# Altium PCB Y904A23-GF-DYPCB-V1.0.PcbDoc
Units mm, origin at the board's own origin, x right, y up, seen from the top; angles counter-clockwise.
Board outline 153.03 x 81.79 mm, 4 copper layers (Top Layer, Mid-Layer 1, Mid-Layer 2, Bottom Layer); 116 components, 55 nets, 310 pads, 176 vias.
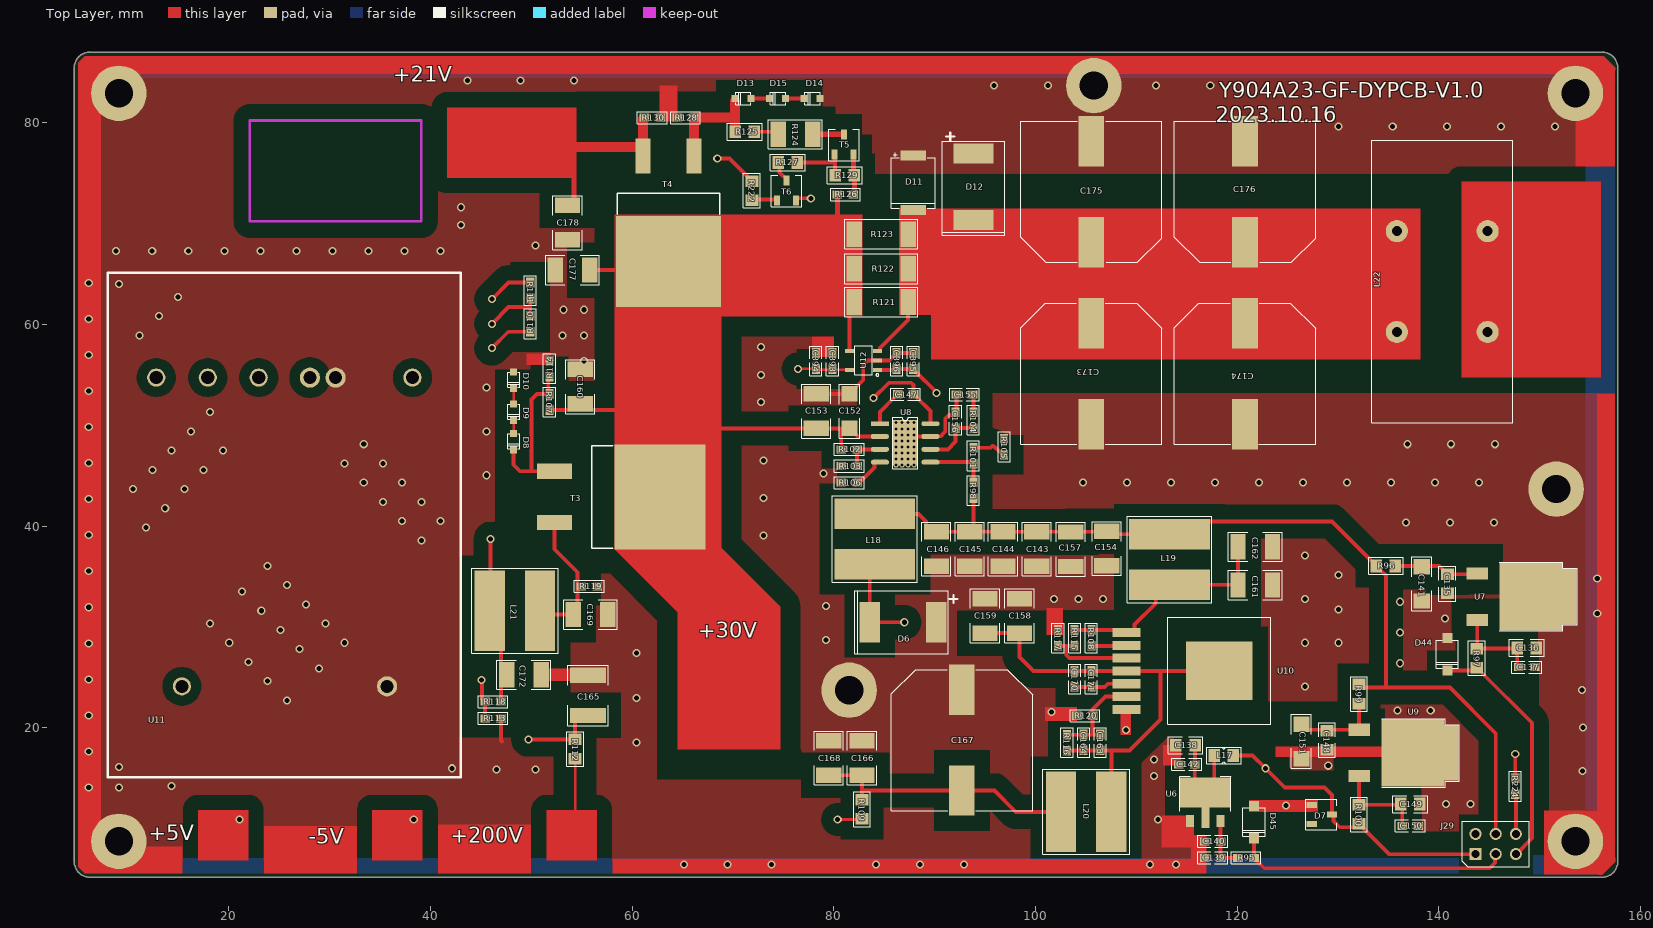
[diagram p0: Top Layer view]
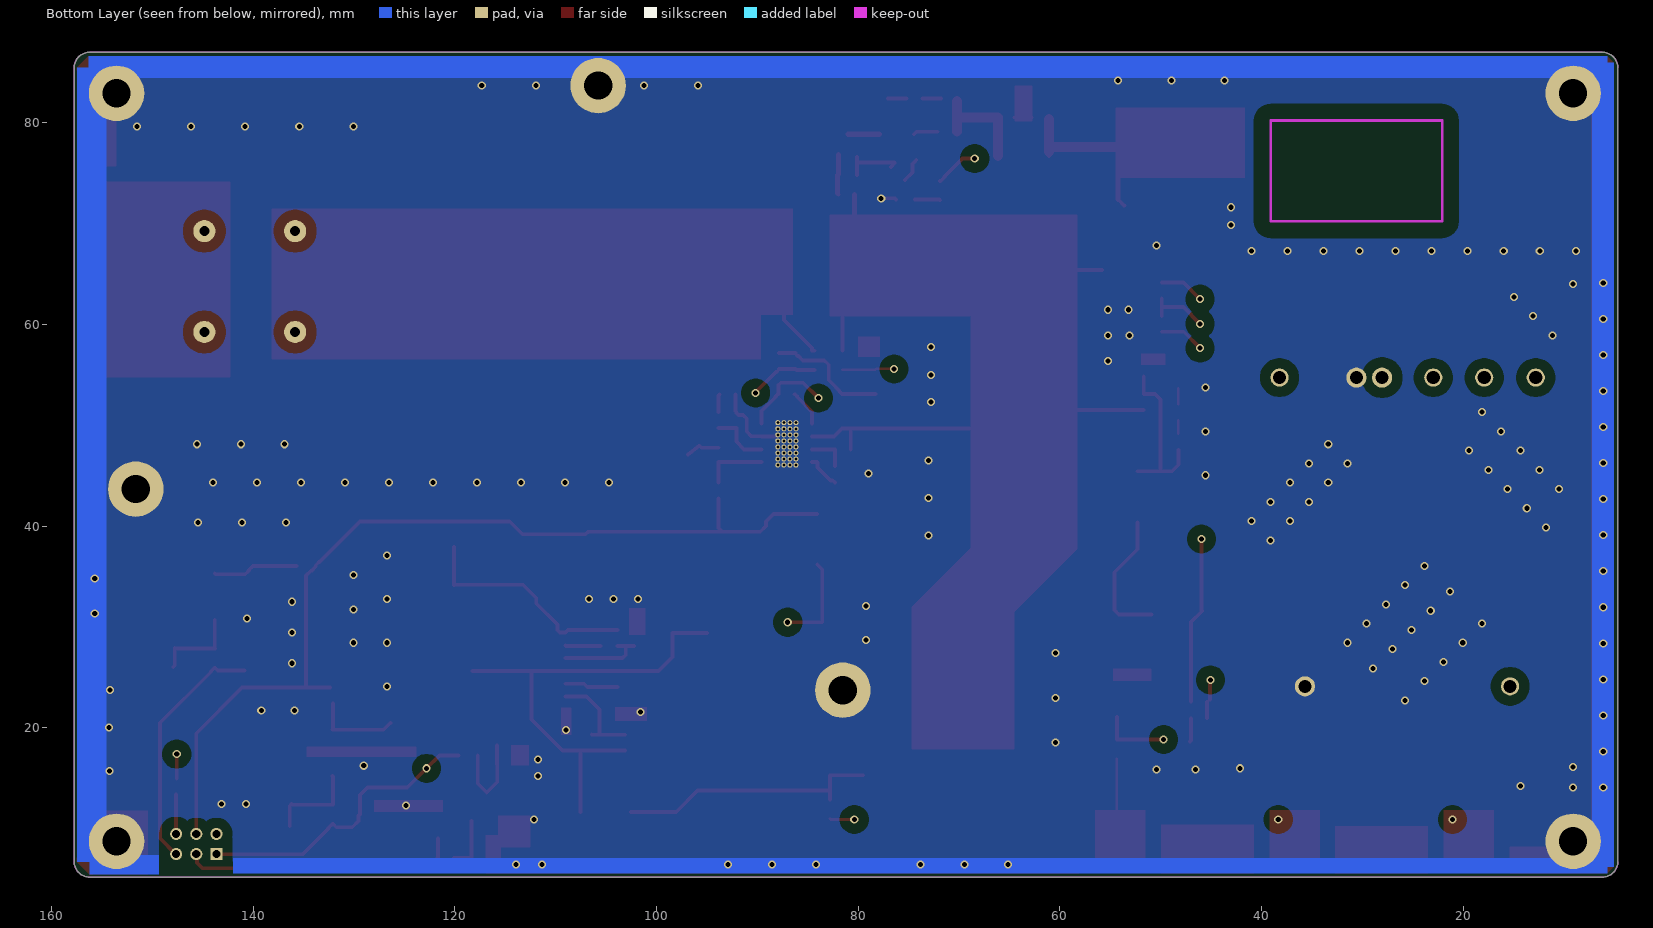
[diagram p1: Bottom Layer view, seen from below]
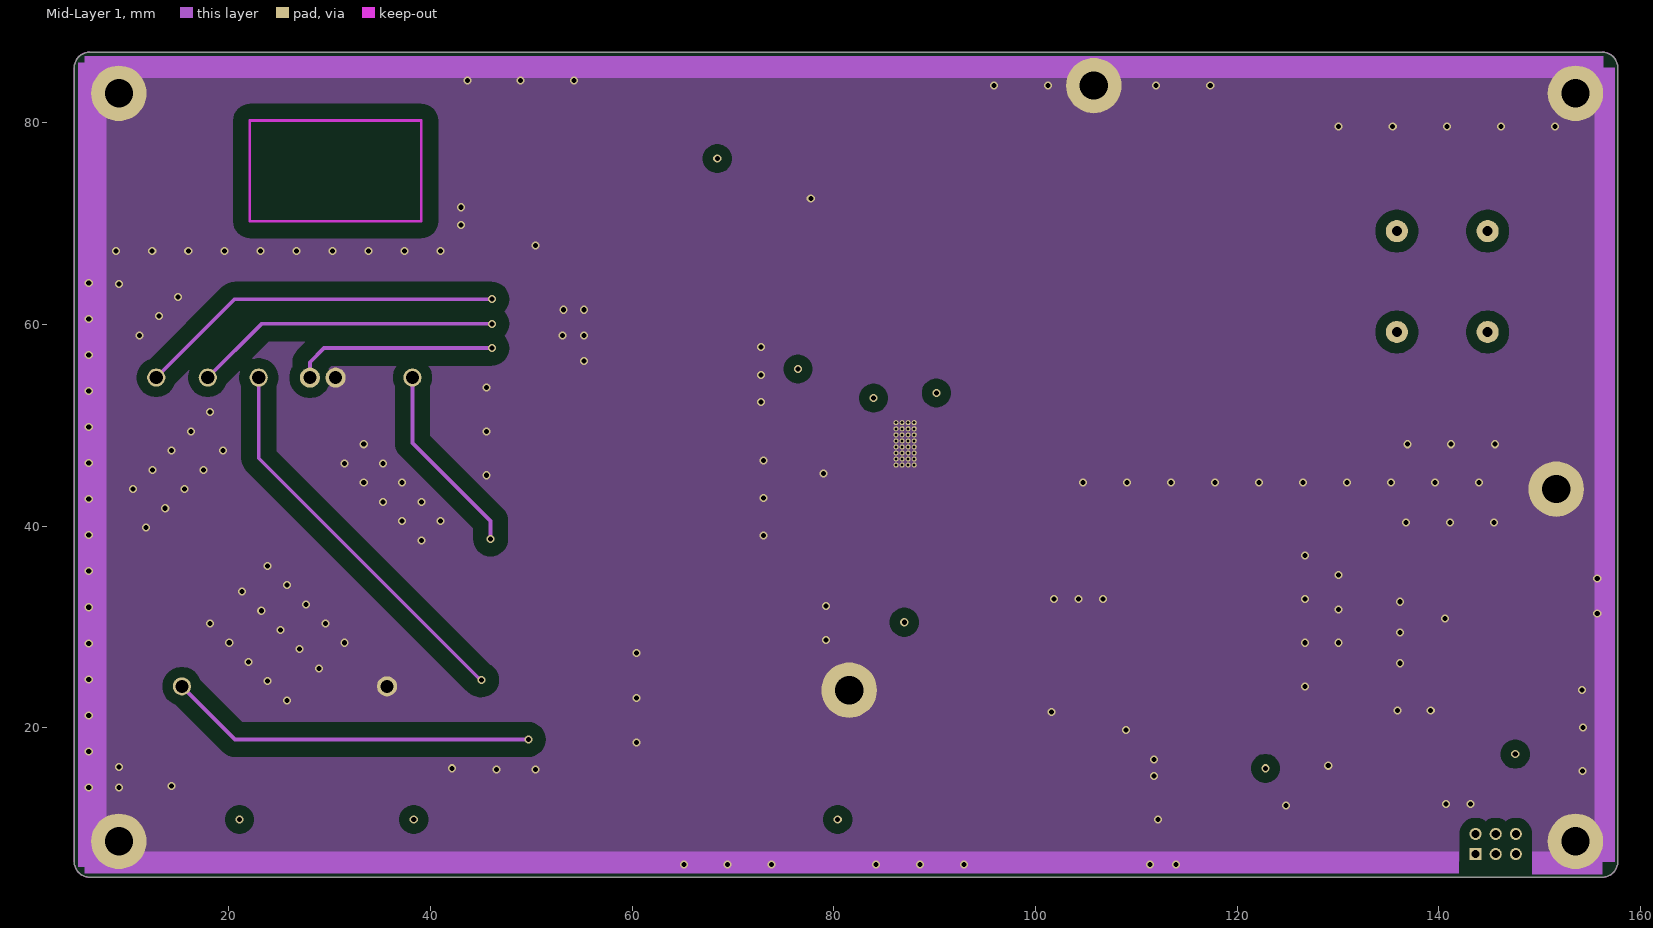
[diagram p2: Mid-Layer 1]
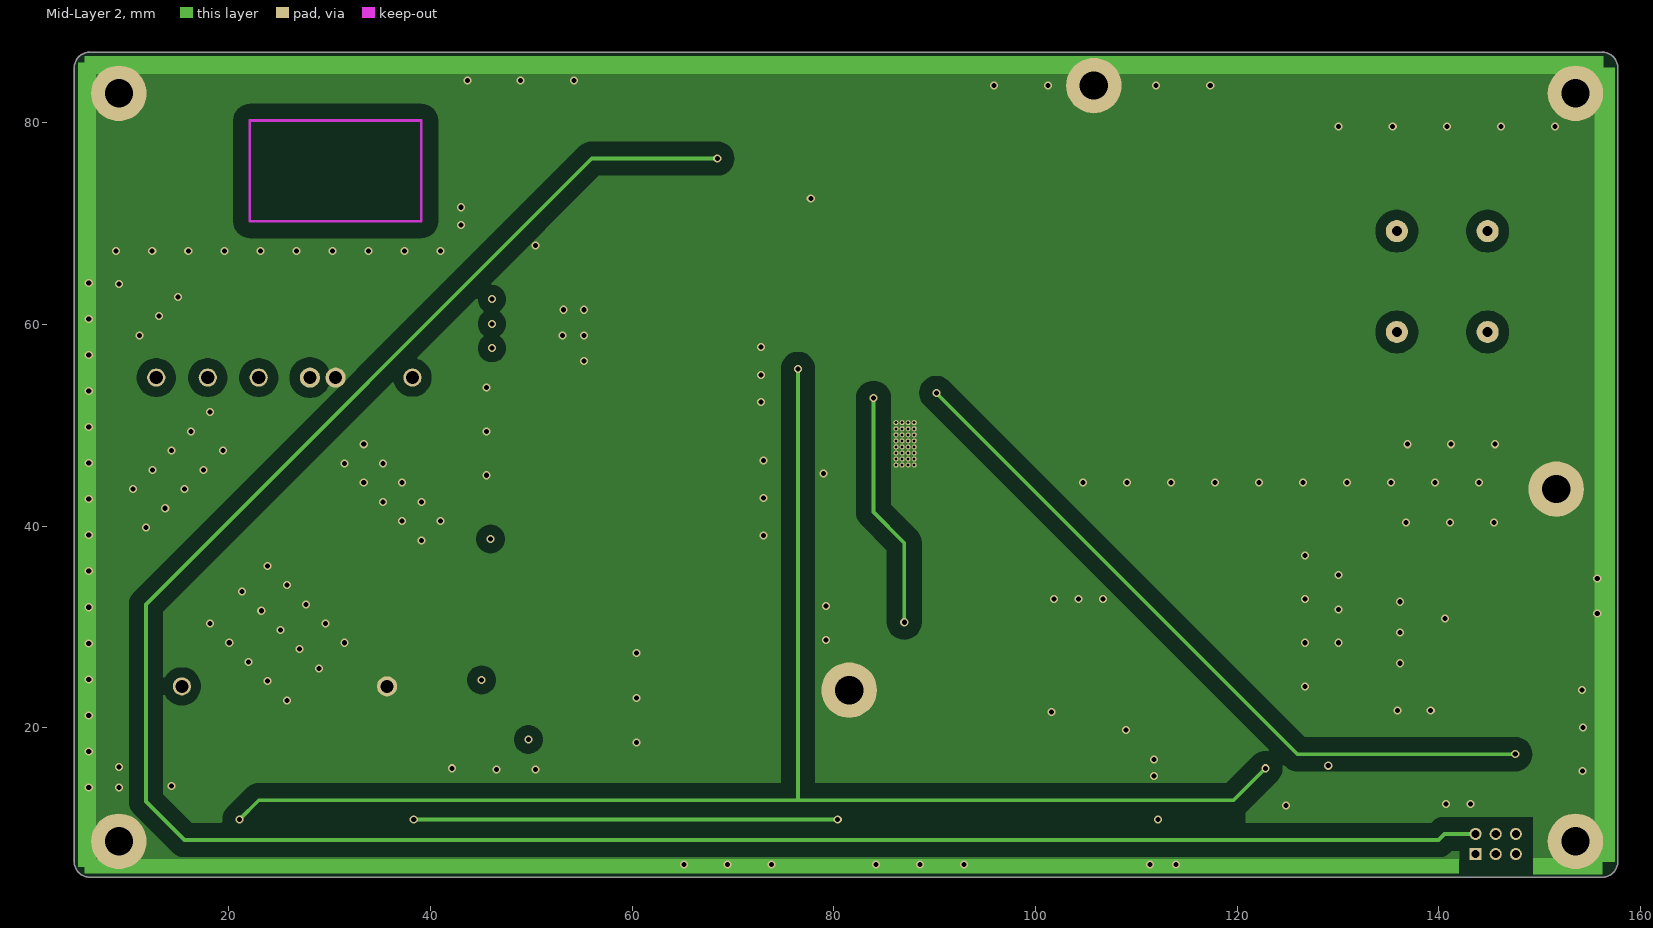
[diagram p3: Mid-Layer 2]

## Layer stack, top to bottom
Top Solder: solder mask 0.0102, Solder Resist, Dk 3.5
Top Layer: signal copper 0.0356
Dielectric 1: dielectric 0.32, FR-4, Dk 4.8
Mid-Layer 1: signal copper 0.0356
Dielectric2: dielectric 0.32, FR-4, Dk 4.8
Mid-Layer 2: signal copper 0.0356
Dielectric3: dielectric 0.32, FR-4, Dk 4.8
Bottom Layer: signal copper 0.0356
Bottom Solder: solder mask 0.0102, Solder Resist, Dk 3.5

## Board outline
4.699,6.731 4.699,85.471 cw(c6.223,85.471) 6.223,86.995 156.21,86.995 cw(c156.21,85.471) 157.734,85.471 157.734,6.731 cw(c156.21,6.731) 156.21,5.207 6.223,5.207 cw(c6.223,6.731)

## Design rules (kind name [scope] priority, off if disabled: settings)
Clearance LBBZHUANYONG [InNamedPolygon('LB')] p1: gap=0.254 ignorepadtopadclearanceinfootprint=TRUE except(0: Arc-Hole Track-Hole SMDPad-Hole THPad-Hole Via-Hole Fill-Hole Poly-Hole Region-Hole Text-Hole; 1.016: Arc-Poly THPad-Poly Via-Poly Poly-Poly; 1.524: Track-Poly SMDPad-Poly Fill-Poly; 2.032: Poly-Region)
Clearance KZBZHUANYONG [InNamedPolygon('KZ')] p2: gap=0.254 ignorepadtopadclearanceinfootprint=TRUE except(0: Arc-Hole Track-Hole SMDPad-Hole THPad-Hole Via-Hole Fill-Hole Poly-Hole Region-Hole Text-Hole; 1.016: Arc-Poly Track-Poly THPad-Poly Via-Poly Poly-Poly; 1.524: SMDPad-Poly Fill-Poly; 2.032: Poly-Region)
Clearance [All] p3: gap=0.2 ignorepadtopadclearanceinfootprint=TRUE except(0: Arc-Hole Track-Hole SMDPad-Hole THPad-Hole Via-Hole Fill-Hole Poly-Hole Region-Hole Text-Hole; 1.016: Arc-Poly THPad-Poly Via-Poly Poly-Poly; 1.524: Track-Poly SMDPad-Poly Fill-Poly; 2.032: Poly-Region)
ComponentClearance [All] p1 off: gap=0.254 collisioncheckmode=3 verticalgap=0.254 showdistances=FALSE
HoleSize [All] p1: absolutevalues=TRUE maxlimit=5 minlimit=0.025 maxpercent=80.000 minpercent=20.000
MinimumSolderMaskSliver [All] p1: minsoldermaskwidth=0.06
PolygonConnect [All] p1: connectstyle=Direct reliefconductorwidth=0.254 reliefentries=4 polygonreliefangle="90 Angle" airgapwidth=0.254
RoutingVias RoutingVias_NET [InNet('NET')] p1: holewidth=0.711 width=1.27 viastyle="Through Hole" minholewidth=0.711 minwidth=1.27 maxholewidth=0.711 maxwidth=1.27
RoutingVias [All] p2: holewidth=0.711 width=1.27 viastyle="Through Hole" minholewidth=0.3 minwidth=0.5 maxholewidth=5 maxwidth=5
SilkToSilkClearance [All] p1: silktosilkclearance=0
SilkToSolderMaskClearance [IsPad] p1: minsilkscreentomaskgap=0 clearancetoexposedcopper=TRUE
SolderMaskExpansion [All] p1: expansion=0.102 istentingtop=FALSE
Width [All] p1: maxlimit=15 minlimit=0.254 preferedwidth=0.838
25 further rules are at their usual default settings.

## Components (designator, comment, footprint, x,y, rotation, side; value= is the part's Value field where it differs from the comment)
C135 "0805-1uF-50V" C0805 140.843,34.29 r90 top
C136 "0805-10uF-16V" C0805 148.717,27.94 r180 top
C137 "0603-1uF-16V" C0603 148.717,26.035 r180 top
C138 "0805-4.7uF-16V" C0805 114.874,18.288 r0 top
C139 "0603-1uF-16V" C0603 117.574,7.112 r0 top
C140 "0603-1uF-16V" C0603 117.574,8.763 r0 top
C141 "1206-10uF-50V" C1206 138.303,34.29 r90 top
C142 "0603-1uF-16V" C0603 115.001,16.383 r0 top
C143 "1210-22uF-25V" C1210 100.132,37.74 r270 top
C144 "1210-22uF-25V" C1210 96.78,37.74 r270 top
C145 "1210-22uF-25V" C1210 93.478,37.74 r270 top
C146 "1210-22uF-25V" C1210 90.176,37.74 r270 top
C147 "0603-0.1uF-50V" C0603 87.122,53.086 r0 top
C148 "0805-1uF-50V" C0805 128.905,18.796 r90 top
C149 "0805-10uF-16V" C0805 137.16,12.446 r180 top
C150 "0603-1uF-16V" C0603 137.16,10.287 r180 top
C151 "1206-10uF-50V" C1206 126.365,18.669 r90 top
C152 "1206-1uF-100V" C1206 81.566,51.414 r90 top
C153 "1210-10uF-100V" C1210 78.264,51.414 r90 top
C154 "1210-10uF-50V" C1210 107.061,37.787 r90 top
C155 "0603-0.01uF-50V" C0603 92.964,53.058 r0 top
C156 "0603-39pF-50V" C0603 92.075,50.518 r270 top
C157 "1210-10uF-50V" C1210 103.505,37.719 r90 top
C158 "1210-10uF-50V" C1210 98.425,31.115 r270 top
C159 "1210-47uF-50V" C1210 94.996,31.115 r270 top
C160 "1210-1uF-100V" C1210 54.864,53.848 r90 top
C161 "1210-47uF-50V" C1210 121.793,34.163 r180 top
C162 "1210-10uF-50V" C1210 121.793,37.973 r180 top
C163 "0603-0.01uF-50V" C0603 106.426,18.57 r270 top
C164 "0603-0.01uF-50V" C0603 104.775,18.57 r270 top
C165 "1812-1000pF-2kV" C1812 55.626,23.241 r270 top
C166 "1210-47uF-50V" C1210 82.804,17.018 r270 top
C167 "VMML1351J221MV" CAE-13.5X13.5X13.5mm(SMD) 92.71,18.796 r90 top
C168 "1210-10uF-50V" C1210 79.502,17.018 r270 top
C169 "1210-47uF-50V" C1210 55.88,31.242 r0 top
C170 "0603-0.01uF-50V" C0603 103.886,24.864 r90 top
C171 "0603-0.01uF-50V" C0603 105.537,24.864 r90 top
C172 "1210-47uF-50V" C1210 49.276,25.273 r180 top
C173 "VMML1351J221MV" CAE-13.5X13.5X13.5mm(SMD) 105.537,55.118 r90 top
C174 "VMML1351J221MV" CAE-13.5X13.5X13.5mm(SMD) 120.777,55.118 r90 top
C175 "VMML1351J221MV" CAE-13.5X13.5X13.5mm(SMD) 105.537,73.152 r270 top
C176 "VMML1351J221MV" CAE-13.5X13.5X13.5mm(SMD) 120.777,73.152 r270 top
C177 "1210-1uF-100V" C1210 54.102,65.405 r180 top
C178 "1210-47uF-50V" C1210 53.594,70.104 r270 top
C393 "0603-0.1uF-50V" C0603 79.883,56.388 r270 top
C394 "0603-1000pF-50V" C0603 78.232,56.388 r270 top
C395 "0603-1000pF-50V" C0603 87.884,56.388 r270 top
C396 "0603-0.1uF-50V" C0603 86.233,56.388 r270 top
D6 "SM8100C" SMC 86.868,30.48 r270 top
D7 "LMBZ5236BLT1G" SOT-23 128.397,11.43 r270 top
D8 "MM5Z8V2T1G" SOD-523 48.26,48.387 r90 top
D9 "MM5Z10V1T1G" SOD-523 48.26,51.308 r90 top
D10 "MM5Z10V1T1G" SOD-523 48.26,54.483 r90 top
D11 "SMBFJ150A" SMB 87.884,74.041 r0 top
D12 "SM8100C" SMC 93.853,73.66 r0 top
D13 "MM5Z5V1T1G" SOD-523 70.993,82.407 r0 top
D14 "MM5Z10V1T1G" SOD-523 77.851,82.407 r0 top
D15 "MM5Z10V1T1G" SOD-523 74.422,82.407 r0 top
D44 "SMF6.5A" SOD-123FL 140.843,27.305 r180 top
D45 "SMF5.0A" SOD-123FL 121.666,10.668 r180 top
J29 "双排直插母座6孔" Ë«ÅÅÖ±²åÄ¸×ù6¿×£¨2*3PIN¼ä¾à2¸ß4.3£© 143.637,7.493 r90 top
L17 "CBG201209U310T" L0805 118.684,17.272 r0 top
L18 "PIO75-6R8MT" L7.8x7.0x5.0 84.074,38.735 r180 top
L19 "PIO75-470MT" L7.8x7.0x5.0 113.284,36.703 r0 top
L20 "PIO75-470MT" L7.8x7.0x5.0 105.029,11.684 r270 top
L21 "PIO75-470MT" L7.8x7.0x5.0 48.387,31.623 r270 top
L22 "T22*14*8-1MH 1.2线径 15A" T22*14*8 140.335,64.262 r0 top
R95 "0603-0R" R0603 120.876,7.112 r180 top
R96 "0805-0R" R0805 134.747,36.068 r180 top
R97 "0805-0R" R0805 143.764,26.924 r90 top
R98 "0603-143k" R0603 93.853,43.561 r270 top
R99 "0805-0R" R0805 132.08,23.368 r90 top
R100 "0805-0R" R0805 132.08,11.43 r90 top
R101 "0603-10k" R0603 93.853,46.99 r270 top
R102 "NC" R0603 81.534,47.625 r180 top
R103 "NC" R0603 81.534,45.974 r0 top
R104 "0603-12k" R0603 93.853,50.518 r270 top
R105 "0603-0R" R0603 96.901,47.879 r270 top
R106 "0603-100k" R0603 81.534,44.323 r0 top
R107 "0603-6.8k" R0603 51.816,52.324 r90 top value=137R
R108 "0603-30k" R0603 105.537,28.928 r90 top value=137R
R109 "0805-0R" R0805 82.804,11.938 r90 top value=137R
R110 "0603-4k" R0603 49.911,60.071 r90 top value=137R
R111 "0603-6k" R0603 49.911,63.373 r90 top value=137R
R112 "0805-0R" R0805 54.356,17.907 r90 top value=137R
R113 "NC" R0603 46.228,20.955 r180 top value=137R
R114 "0603-150k" R0603 51.816,55.626 r90 top value=137R
R115 "0603-68k" R0603 103.886,28.928 r270 top value=137R
R116 "0603-1.2k" R0603 103.124,18.542 r90 top value=137R
R117 "0603-12k" R0603 102.235,28.928 r270 top value=137R
R118 "NC" R0603 46.228,22.606 r180 top value=137R
R119 "0603-30k" R0603 55.753,34.036 r0 top value=137R
R120 "0603-6.2k" R0603 104.902,21.209 r0 top value=137R
R121 "PE2010FKF7W0R01L" R2010 84.709,62.23 r0 top
R122 "PE2010FKF7W0R01L" R2010 84.709,65.532 r0 top
R123 "PE2010FKF7W0R01L" R2010 84.709,68.961 r0 top
R124 "1210-10k" R1210 76.2,78.867 r180 top value=137R
R125 "0805-0R" R0805 71.181,79.121 r0 top value=137R
R126 "0603-10K" R0603 81.153,72.898 r0 top value=137R
R127 "0805-270k" R0805 75.438,76.073 r0 top value=137R
R128 "0603-120k" R0603 65.306,80.518 r180 top value=137R
R129 "0805-100k" R0805 81.092,74.803 r0 top value=137R
R130 "0603-30K" R0603 62.004,80.518 r0 top value=137R
R222 "0805-1k" R0805 71.882,73.279 r90 top value=137R
R224 "0603-1.5R" R0603 147.574,14.224 r270 top
T3 "NCE70T360D" TO-263-2 60.452,42.926 r270 top
T4 "NCE70T360D" TO-263-2 63.627,68.58 r180 top
T5 "BSR92P" SOT-23 81.026,77.851 r0 top
T6 "BSS131" SOT-23 75.311,73.279 r0 top
U6 "LP3986H-33X3F" SOT-89 116.84,13.589 r0 top
U7 "78D05" TO-252 149.098,33.02 r270 top
U8 "SCT2650" ESOP8L 84.582,50.165 r0 top
U9 "78D05" TO-252 137.414,17.526 r270 top
U10 "LMZ14201TZ" TO-263-7 118.237,25.654 r270 top
U11 "DW-P501-20FP1" DW-PXXX-20XP1 12.827,54.737 r90 top
U12 "INA194AIDBVR" SOT-23-5 84.328,55.499 r180 top

## Footprints (in the part's own frame and the unit in brackets; to place one, negate y for a bottom-side part, rotate by r counter-clockwise, add the part's x,y. Pads: shape width x height; smd on the part's side, far side on the other; paste and mask are expansions set on the pad)
C0603 [mm]
  rect 0.96x0.8 smd: 1(-0.79,0) 2(0.79,0)
  silkscreen extent -1.47,-0.6 1.47,0.6
C0805 [mm]
  rect 1.14x1.27 smd: 1(-0.95,0) 2(0.95,0)
  silkscreen extent -1.72,-0.83 1.72,0.83
C1206 [mm]
  rect 1.52x1.6 smd: 1(-1.71,0) 2(1.71,0)
  silkscreen extent -2.67,-1 2.67,1
C1210 [mm]
  rect 1.52x2.5 smd: 1(-1.71,0) 2(1.71,0)
  silkscreen extent -2.67,-1.45 2.67,1.45
C1812 [mm]
  rect 1.52x3.6 smd: 1(-2,0) 2(2,0)
  silkscreen extent -3,-2 3,2
CAE-13.5X13.5X13.5mm(SMD) [mm] "13.5X13.5X13.5mm"
  rect 5x2.54 smd: 1(5,0) 2(-5,0)
  silkscreen extent -7,-7 7,7
DW-PXXX-20XP1 [mm]
  round 1.8 hole 1.3: 1(0,0) 2(0,-5.11) 3(0,-10.16) 6(0,-25.4) 7(-30.61,-2.54)
  round 2 hole 1.3: 4(0,-15.24) 5(0,-17.78) 8(-30.61,-22.88)
  silkscreen extent -39.61,-30.19 10.39,4.81
ESOP8L [mm] "1.27mm"
  round 0.5 hole 0.3: 0(1.6,-4.1) 0(1.6,-3.5) 0(1.6,-2.9) 0(1.6,-2.3) 0(1.6,-1.7) 0(1.6,-1.1) 0(1.6,-0.5) 0(1.6,0.1) 0(2.2,-4.1) 0(2.2,-3.5) 0(2.2,-2.9) 0(2.2,-2.3) 0(2.2,-1.7) 0(2.2,-1.1) 0(2.2,-0.5) 0(2.2,0.1) 0(2.8,-4.1) 0(2.8,-3.5) 0(2.8,-2.9) 0(2.8,-2.3) 0(2.8,-1.7) 0(2.8,-1.1) 0(2.8,-0.5) 0(2.8,0.1) 0(3.4,-4.1) 0(3.4,-3.5) 0(3.4,-2.9) 0(3.4,-2.3) 0(3.4,-1.7) 0(3.4,-1.1) 0(3.4,-0.5) 0(3.4,0.1)
  rect 2.4x4.5 smd: 0(2.502,-1.905)
  rect 1.8x0.49 smd: 1(0,0)
  oval 1.8x0.49 smd: 2(0,-1.27) 3(0,-2.54) 4(0,-3.81) 5(5.005,-3.81) 6(5.005,-2.54) 7(5.005,-1.27) 8(5.005,0)
  silkscreen extent 1.26,-4.44 3.75,0.64
L7.8x7.0x5.0 [mm]
  rect 8x3 smd: 1(0,2.5) 2(0,-2.5)
  silkscreen extent -4.2,-4.3 4.2,4.3
L0805 [mm] "2.0X1.25(2012)"
  rect 1.14x1.27 smd: 1(-0.95,0) 2(0.95,0)
  silkscreen extent -1.72,-0.83 1.72,0.83
R0603 [mm] "1.6X0.8(1608)"
  rect 0.96x0.8 smd: 1(-0.79,0) 2(0.79,0)
  silkscreen extent -1.47,-0.6 1.47,0.6
R0805 [mm] "2.0X1.25(2012)"
  rect 1.14x1.27 smd: 1(-0.95,0) 2(0.95,0)
  silkscreen extent -1.72,-0.83 1.72,0.83
R1210 [mm] "3.2X2.5(3225)"
  rect 1.52x2.5 smd: 1(-1.71,0) 2(1.71,0)
  silkscreen extent -2.67,-1.45 2.67,1.45
R2010 [mm] "5.0X2.5(5025)"
  rect 1.52x2.54 smd: 1(-2.665,0) 2(2.665,0)
  silkscreen extent -3.62,-1.47 3.62,1.47
SMB [mm]
  rect 2.5x1 smd: 1(0,-2.7) 2(0,2.7)
  silkscreen extent -2.2,-2.5 2.2,3
SMC [mm]
  rect 4x2 smd: 1(0,-3.3) 2(0,3.3)
  silkscreen extent -3.1,-4.8 3.1,5.4
SOD-123FL [mm]
  rect 1x1 smd: 1(0,1.6) 2(0,-1.6)
  silkscreen extent -1.1,-1.4 1.1,1.4
SOD-523 [mm]
  rect 0.7x0.7 smd: 1(-0.8,0) 2(0.8,0)
  silkscreen extent -0.7,-0.6 0.8,0.6
SOT-23 [mm]
  rect 0.6x1 smd: 1(-0.95,-1) 2(0.95,-1) 3(0,1)
  silkscreen extent -1.5,-1.6 1.5,1.5
SOT-23-5 [mm]
  rect 0.9x0.4 smd: 1(0,0) 2(0,-0.95) 3(0,-1.9) 4(2.75,-1.9) 5(2.75,0)
  silkscreen extent -0.14,-2.4 2.24,0.64
SOT-89 [mm]
  rect 0.8x1.2 smd: 1(-1.5,-2.8) 3(1.5,-2.8)
  rect 0.8x2.2 smd mask+0.102: 2(0,-2.4)
  rect 5x3 smd mask+0.102: 2(0,0)
  Top Layer pour cut-out: -2.5,-1.475 2.5,-1.475 2.5,-3.375 -2.5,-3.375
  silkscreen extent -2.54,-1.85 2.54,1.6
T22*14*8 [mm]
  round 2.2 hole 1: 1(-4.5,5) 2(4.5,5) 3(-4.5,-5) 4(4.5,-5)
  silkscreen extent -7,-14 7,14
TO-252 [mm]
  rect 1.2x2.1 smd: 1(-2.3,-5.3) 3(2.3,-5.3)
  rect 5.5x1.5 smd: 2(0,3.8)
  rect 6.7x6.2 smd: 2(0,0)
  silkscreen extent -3.4,-3.1 3.4,4.6
TO-263-2 [mm]
  rect 1.5x3.5 smd: 1(-2.53,-8.135) 3(2.55,-8.135)
  rect 10.4x9 smd: 2(0.01,2.32)
  silkscreen extent -5.07,-4.45 5.09,-2.36
TO-263-7 [mm]
  rect 5.8x6.6 smd paste+0 mask+0.05: 0(0,0)
  rect 0.9x2.8 smd paste+0 mask+0.05: 1(-3.81,-9.2) 2(-2.54,-9.2) 3(-1.27,-9.2) 4(0,-9.2) 5(1.27,-9.2) 6(2.54,-9.2) 7(3.81,-9.2)
  silkscreen extent -5.3,-5.1 5.3,5.1
Ë«ÅÅÖ±²åÄ¸×ù6¿×£¨2*3PIN¼ä¾à2¸ß4.3£© [mm]
  rect 1.2x1.2 hole 0.8: 1(0,0)
  round 1.2 hole 0.8: 2(0,-2) 3(0,-4) 4(2,0) 5(2,-2) 6(2,-4)
  silkscreen extent -1.25,-5.3 3.25,1.3

## Part data
C135 C136 C137 C138 C139 C140 C141 C142 C143 C144 C145 C146 C147 C148 C149 C150 C151 C152 C153 C154 C155 C156 C157 C158 C159 C160 C161 C162 C163 C164 C165 C166 C168 C169 C170 C171 C172 C177 C178 C393 C394 C395 C396: library part Cap1, "ÌÕ´ÉµçÈÝ,³§¼Ò", ÐÔÄÜ=ÌÕ´ÉµçÈÝ
C167 C173 C174 C175 C176: "µç½âµçÈÝ,YminÓÀÃú", ³§¼Ò=YminÓÀÃú, ·â×°ÃèÊö=13.5X13.5X13.5mm, ÐÔÄÜ=63V220UF
D6 D12: "Ð¤ÌØ»ù¶þ¼«¹Ü,ÀÖÉ½ÎÞÏßµç", ³§¼Ò=ÀÖÉ½ÎÞÏßµç, ·â×°ÃèÊö=SMC, ÐÔÄÜ=100V£¬8A
D7: "ÎÈÑ¹¶þ¼«¹Ü,ÀÖÉ½ÎÞÏßµç", ³§¼Ò=ÀÖÉ½ÎÞÏßµç, ·â×°ÃèÊö=SOT-23, ÐÔÄÜ=7.12~7.88V
D8 D9 D10 D13 D14 D15: "ÎÈÑ¹¶þ¼«¹Ü,ON°²É­ÃÀ", ³§¼Ò=ON°²É­ÃÀ, ·â×°ÃèÊö=SOD-523
  D8: ÐÔÄÜ=8.2V
  D13: ÐÔÄÜ=5.1V
D11: "TVS¶þ¼«¹Ü,ÀÖÉ½ÎÞÏßµç", ³§¼Ò=ÀÖÉ½ÎÞÏßµç, ·â×°ÃèÊö=SMB, ÐÔÄÜ=150V£¬2.5A
D44 D45: "TVS¶þ¼«¹Ü,½­ËÕ³¤µç/³¤¾§", ³§¼Ò=½­ËÕ³¤µç/³¤¾§, ·â×°ÃèÊö=SOD-123FL
  D44: ÐÔÄÜ=6.5V£¬17.8A
  D45: ÐÔÄÜ=5V£¬21.7A
J29: library part Ë«ÅÅÖ±²åÄ¸×ù6¿×, "µçÁ¬½ÓÆ÷,³§¼Ò", ·â×°ÃèÊö=2*3PIN¼ä¾à2mm¸ß4.3mm, ÐÔÄÜ=Ë«ÅÅÖ±²åÄ¸×ù6¿×
L17: "´ÅÖé,·ç»ª", ³§¼Ò=·ç»ª, ·â×°ÃèÊö=L0805, ÐÔÄÜ=31¦¸@100MHz,900mA
L18 L19 L20 L21: "¹¦ÂÊµç¸Ð,·ç»ª", ³§¼Ò=·ç»ª, ·â×°ÃèÊö=L7.8x7.0x5.0mm
  L18: ÐÔÄÜ=6.8uH£¬3.0A£¬41m¦¸
  L19 L20 L21: ÐÔÄÜ=47uH£¬1.25A£¬190m¦¸
L22: library part "T22*14*8-1MH 1.2Ïß¾¶ 15A", "¹²Ä£µç¸Ð,ÉîÛÚ¿­±Ø´ï", ³§¼Ò=ÉîÛÚ¿­±Ø´ï, ·â×°ÃèÊö=T14*8*7, ÐÔÄÜ=³ÉÆ·Íâ¾¶16.5mm,³ÉÆ·ºñ¶È10.5mm,1mH0.8Ïß¾¶8A
R95 R96 R97 R98 R99 R100 R101 R102 R103 R104 R105 R106 R107 R108 R109 R110 R111 R112 R113 R114 R115 R116 R117 R118 R119 R120 R124 R125 R126 R127 R128 R129 R130 R222 R224: library part Resistance, "½ðÊôÓÔµç×è,³§¼Ò"
R121 R122 R123: "µçÁ÷²ÉÑùµç×è,YAGEO(¹ú¾Þ)", ³§¼Ò=YAGEO(¹ú¾Þ), ·â×°ÃèÊö=2010, ÐÔÄÜ="10m¦¸ ¡À1% 1W"
T3 T4: "NMOS,ÎÞÎýÐÂ½àÄÜ", ³§¼Ò=ÎÞÎýÐÂ½àÄÜ, ·â×°ÃèÊö=TO-263, ÐÔÄÜ="VDS =700V,ID=7A,Vth=3~4V"
T5: "PMOS,InfineonÓ¢·ÉÁè", ³§¼Ò=InfineonÓ¢·ÉÁè, ·â×°=SOT-23, ÐÔÄÜ="VDS =-250V,ID=-0.11A,Vth=-2~-1V"
T6: "NMOS,InfineonÓ¢·ÉÁè", ³§¼Ò=InfineonÓ¢·ÉÁè, ·â×°=SOT-23, ÐÔÄÜ="VDS =240V,ID=0.09A,Vth=0.8~1.8V"
U6: "LDO,Î¢Ô´°ëµ¼Ìå", ³§¼Ò=Î¢Ô´°ëµ¼Ìå, ·â×°ÃèÊö=SOT-89, ÐÔÄÜ="2.5 ~ 6.5V,3.3V,500mA"
U7 U9: "LDO,·ðÉ½À¶¼ý", ³§¼Ò=·ðÉ½À¶¼ý, ·â×°ÃèÊö=TO-252, ÐÔÄÜ=7~36V,5V,1.5A
U8: "DC-DC,Ð¾ÖÞ¿Æ¼¼", ³§¼Ò=Ð¾ÖÞ¿Æ¼¼, ·â×°ÃèÊö=ESOP8L, ÐÔÄÜ=4.5~60V,0.8~57V,5A
U10: "DC-DC,TIµÂÖÝÒÇÆ÷", ³§¼Ò=TIµÂÖÝÒÇÆ÷, ·â×°ÃèÊö=TO-263-7, ÐÔÄÜ=6~42V,0.8~6V,1A
U11: "DC-DC,¶«ÎÄ", ³§¼Ò=¶«ÎÄ, ·â×°ÃèÊö=50*35*20mm, ÐÔÄÜ=24V/500V/20mA
U12: "·ÖÁ÷¼à²â¼Æ,TI", ³§¼Ò=Ê¥°îÎ¢, ·â×°=SOT23-5, ÐÔÄÜ="-5V 60mA"

## Free pads (board coordinates)
  round 5.5 hole 2.8 mask+0: 2.8(9.121,8.763) 2.8(9.121,82.931) 2.8(81.534,23.749) 2.8(105.791,83.693) 2.8(151.638,43.688) 2.8(153.543,8.763) 2.8(153.543,82.931)

## Via types
v1: diameter 0.8, hole 0.5, Top Layer to Bottom Layer, tented bottom, 173 vias
v2: diameter 0.813, hole 0.508, Top Layer to Bottom Layer, tented bottom, 3 vias

## Nets (pads, with @x,y where several pads share a name; then routed paths per layer and width w, separated by ;. In a path a pad name is that pad's centre, name@x,y a point inside that pad or via, vN(x,y) a via of type N, cw(c..) or ccw(c..) an arc to the next point about the centre after c; other vN are vias at no path point)
3.3VFSALC: D45.1 J29.2 R95.1 | length 27.4
  Top Layer w0.381: D45.1 R95.1 121.746,7.112 121.956,6.902 121.956,6.822 122.682,6.096 145.034,6.096 145.576,6.638 145.576,7.41 J29.2@145.637,7.471
12V: C143.1 C144.1 C145.1 C146.1 C154.2 C157.2 J29.5 L18.2 L19.1 R96.2 R98.2 R99.2 | length 94.3
  Top Layer w0.381: L18.2 84.105,41.204 88.422,41.204 89.148,40.478 89.148,40.019 89.717,39.45 C146.1 C145.1 ; R98.2 93.853,39.825 C145.1 ; C157.2@103.484,39.45 C143.1 C144.1 C145.1 ; C157.2@103.505,39.45 106.786,39.45 106.807,39.429 107.033,39.203 L19.1 114.553,40.472 129.393,40.472 133.352,36.512 133.417,36.512 133.797,36.133 133.797,36.003 134.177,35.623 134.241,35.623 134.747,35.118 134.747,24.003 ; R99.2@132.395,24.003 134.747,24.003 ; J29.5 145.637,19.463 141.097,24.003 134.747,24.003
194out: C395.2 C396.2 R224.1 U12.1 | length 81.6
  Top Layer w0.381: U12.1 86.134,55.499 C396.2 C395.2 87.884,55.518 88.094,55.308 88.174,55.308 90.17,53.312 v1(90.17,53.213) ; R224.1@147.574,14.986 v1(147.574,17.399)
  Mid-Layer 2 w0.381: v1(90.17,53.213) 125.984,17.399 v1(147.574,17.399)
+5V: C393.2 C394.2 D7.3 J29.1 L17.2 R100.1 U12.5 | length 181.6
  Top Layer w0.254: v1(76.454,55.598) C394.2 78.331,55.499 U12.5
  Top Layer w0.381: L17.2 121.539,17.272 v1(122.809,16.002) 124.714,14.097 128.651,14.097 129.397,13.351 D7.3 129.444,11.43 129.553,11.321 129.553,10.782 130.175,10.16 131.76,10.16 R100.1 132.145,10.48 132.524,10.1 132.524,10.035 135.089,7.471 J29.1@143.637,7.471
  Mid-Layer 2 w0.381: v2(21.082,10.922) 22.987,12.827 76.454,12.827 ; v1(76.454,55.598) 76.454,12.827 ; v1(122.809,16.002) 119.634,12.827 76.454,12.827
+5VIN: D44.1 J29.3 R97.1 | length 24.5
  Top Layer w0.381: D44.1 143.495,25.705 R97.1 143.829,25.974 144.208,25.594 144.208,25.529 149.225,20.513 149.225,9.059 J29.3@147.637,7.471
+21V: C178.1 R130.1 T4.3 | length 23.3
  Top Layer w0.381: C178.1 53.659,71.814 C178.1@54.229,72.383 ; T4.3 T4.3@61.077,77.099 ; R130.1@61.077,80.381 R130.1
  Top Layer w0.504: 47.879,77.597 54.229,77.597 C178.1@54.229,72.383 ; T4.3@60.579,77.597 T4.3@61.077,77.099
  Top Layer w1: 54.229,77.597 T4.3@60.579,77.597 ; T4.3@61.077,77.099 R130.1@61.077,80.381
+30V: C152.1 C153.1 C160.1 C177.1 R102.2 R107.1 R121.1 R122.1 R123.1 R126.1 T3.2 T4.2 U8.2 U12.4 | length 43.7
  Top Layer w0.381: R107.1@51.689,51.534 53.848,51.534 58.646,51.534 58.674,51.562 ; C177.1 T4.2@60.535,65.405 ; T4.2@60.662,69.215 T4.2 ; 67.691,49.784 67.771,49.704 C153.1 80.645,49.704 ; R102.2 80.744,49.605 80.645,49.704 ; U12.4 81.578,61.764 R121.1 R121.1@82.614,61.66 ; U8.2 82.398,48.895 82.175,49.118 82.175,49.135 81.606,49.704 C152.1 80.645,49.704
  Top Layer w0.508: 80.363,70.358 R126.1
+30VIN: L22.2 L22.4
+200V: R112.1 | length 6.5
  Top Layer w0.254: 54.229,10.541 54.356,10.668 R112.1
-5V: R109.1 | length 44.5
  Top Layer w0.254: v2(80.391,10.922) 82.738,10.922 R109.1
  Mid-Layer 2 w0.381: v2(38.354,10.922) v2(80.391,10.922)
FLJC: J29.6 R224.2 | length 4
  Top Layer w0.381: R224.2@147.637,13.399 J29.6 J29.6@147.701,9.557
  Bottom Layer w0.381: J29.6@147.637,9.471 J29.6
FS: J29.4 R222.2 | length 232.5
  Top Layer w0.381: v1(68.453,76.454) 69.657,76.454 71.438,74.674 71.438,74.609 71.817,74.229 R222.2
  Mid-Layer 2 w0.381: v1(68.453,76.454) 56.007,76.454 11.811,32.258 11.811,12.7 15.621,8.89 139.954,8.89 140.557,9.493 J29.4
GND: C135.1 C136.1 C137.1 C138.1 C139.1 C140.1 C141.1 C142.1 C143.2 C144.2 C145.2 C146.2 C148.1 C149.1 C150.1 C151.1 C152.2 C153.2 C154.1 C155.1 C156.1 C157.1 C158.1 C159.1 C160.2 C161.1 C162.1 C165.1 C166.1 C167.1 C168.1 C169.2 C172.1 C173.2 C174.2 C175.2 C176.2 C177.2 C178.2 C393.1 C394.1 C395.1 C396.1 D6.2 D7.1 D10.2 D11.2 D12.2 D14.2 D44.2 D45.2 pad.2.8 R103.1 R105.1 R106.1 R113.1 R114.2 R117.1 R119.2 R120.1 R128.2 R130.2 T6.2 U6.1 U7.2 U8.0 U8.7 U9.2 U10.7 U11.5 U11.8 U12.2 | length 25.6
  Top Layer w0.381: R113.1 47.018,18.768 47.117,18.669 ; R130.2 R128.2 ; T6.2@76.261,72.406 76.261,72.408 76.371,72.517 v1(77.724,72.517) ; C153.2 C152.2 81.606,53.124 82.175,53.694 82.175,53.734 82.931,54.489 82.931,56.007 83.373,56.449 U12.2 85.504,56.449 85.943,56.888 86.023,56.888 86.233,57.098 C396.1 C395.1 ; U8.0@87.982,49.065 88.014,49.065 88.184,48.895 U8.7 89.608,48.916 90.572,48.916 91.059,49.403 91.059,50.673 91.421,51.035 91.865,51.035 92.075,51.245 C156.1 92.174,51.407 C155.1
  other v1: 65.151,6.477 69.469,6.477 73.848,6.477 84.201,6.477 88.549,6.477 92.898,6.477 111.379,6.477 113.919,6.477 112.141,10.922 124.841,12.319 140.716,12.446 143.129,12.446 6.136,14.097 9.144,14.097 14.351,14.224 111.76,15.24 154.24,15.752 46.579,15.875 50.419,15.875 42.164,16.002 9.144,16.129 129.032,16.256 111.76,16.891 6.136,17.671 60.452,18.542 108.966,19.812 154.305,20.066 6.136,21.245 101.6,21.59 135.89,21.717 139.192,21.717 25.781,22.733 60.452,22.987 154.178,23.749 126.746,24.13 23.876,24.638 6.136,24.819 28.956,25.908 136.144,26.416 21.971,26.543 60.452,27.432 27.051,27.813 6.136,28.394 20.066,28.448 31.496,28.448 126.746,28.448 130.048,28.448 79.248,28.702 136.144,29.464 25.146,29.718 18.161,30.353 29.591,30.353 140.589,30.861 155.702,31.369 23.241,31.623 130.048,31.75 6.136,31.968 79.248,32.109 27.686,32.258 136.144,32.512 101.854,32.766 104.267,32.766 106.68,32.766 126.746,32.766 21.336,33.528 25.781,34.163 155.702,34.798 130.048,35.179 6.136,35.542 23.876,36.068 126.746,37.084 39.116,38.608 73.025,39.091 6.136,39.116 11.811,39.878 136.749,40.386 141.097,40.386 145.445,40.386 37.211,40.513 41.021,40.513 13.716,41.783 35.306,42.418 39.116,42.418 6.136,42.69 73.025,42.799 10.541,43.688 15.621,43.688 33.401,44.323 37.211,44.323 104.715,44.323 109.078,44.323 113.441,44.323 117.804,44.323 122.167,44.323 126.529,44.323 130.892,44.323 135.255,44.323 139.618,44.323 143.981,44.323 45.593,45.055 78.994,45.212 12.446,45.593 17.526,45.593 31.496,46.228 35.306,46.228 6.136,46.264 73.025,46.507 14.351,47.498 19.431,47.498 33.401,48.133 136.876,48.133 141.224,48.133 145.572,48.133 16.256,49.403 45.593,49.403 6.136,49.838 18.161,51.308 72.771,52.324 6.136,53.413 45.593,53.751 72.771,54.991 55.245,56.388 6.136,56.987 72.771,57.785 11.176,58.928 53.086,58.928 55.245,58.928 6.136,60.561 13.081,60.833 53.213,61.468 55.245,61.468 14.986,62.738 9.144,64.008 6.136,64.135 8.854,67.31 12.428,67.31 16.002,67.31 19.576,67.31 23.15,67.31 26.724,67.31 30.299,67.31 33.873,67.31 37.447,67.31 41.021,67.31 50.419,67.818 43.053,69.85 43.053,71.628 130.062,79.629 135.424,79.629 140.787,79.629 146.149,79.629 151.511,79.629 95.885,83.693 101.247,83.693 111.972,83.693 117.334,83.693 43.688,84.201 48.959,84.201 54.229,84.201
NetC135_2: C135.2 C141.2 R96.1 U7.1 | length 8.5
  Top Layer w0.381: R96.1 140.015,36.068 140.398,35.685 140.398,35.62 140.778,35.24 C135.2 143.718,35.24 U7.1
NetC136_2: C136.2 C137.2 R97.2 U7.3 | length 8.9
  Top Layer w0.381: U7.3 143.798,27.908 R97.2 147.701,27.874 C136.2 147.767,26.195 C137.2
NetC138_2: C138.2 C142.2 L17.1 U6.2 | length 9.2
  Top Layer w0.381: C138.2 115.824,16.416 C142.2 115.791,14.638 116.84,13.589 117.734,14.483 L17.1
NetC139_2: C139.2 C140.2 R95.2 U6.3 | length 5.4
  Top Layer w0.381: U6.3 118.34,7.136 C139.2 R95.2
NetC147_1: C147.1 U8.1 | length 3.7
  Top Layer w0.381: U8.1 84.582,51.336 86.042,52.796 86.042,52.876 86.252,53.086 C147.1
NetC147_2: C147.2 D6.1 L18.1 U8.8 | length 42.1
  Top Layer w0.381: v1(83.947,52.705) 85.471,54.229 87.689,54.229 87.912,54.006 C147.2 87.992,53.086 88.202,52.876 88.202,52.796 89.587,51.411 U8.8 ; L18.1 83.568,35.729 D6.1 v1(86.995,30.48)
  Mid-Layer 2 w0.381: v1(83.947,52.705) 83.947,41.402 86.995,38.354 v1(86.995,30.48)
NetC148_2: C148.2 C151.2 R99.1 U9.1 | length 8.6
  Top Layer w0.381: C151.2@126.365,20.506 126.405,20.506 127.085,19.826 U9.1 132.08,19.86 R99.1
NetC149_2: C149.2 C150.2 R100.2 U9.3 | length 9.2
  Top Layer w0.381: U9.3 132.08,15.192 R100.2 136.144,12.38 C149.2 136.37,12.286 C150.2
NetC155_2: C155.2 R104.1 | length 1.8
  Top Layer w0.381: C155.2 93.853,52.959 R104.1
NetC156_2: C156.2 R104.2 U8.6 | length 5.9
  Top Layer w0.381: U8.6 91.313,47.625 92.075,48.387 C156.2 R104.2
NetC158_2: C158.2 C159.2 C163.2 C164.2 C170.2 C171.2 L20.1 R116.1 U10.0 U10.4 | length 47.5
  Top Layer w0.381: C159.2 C158.2 98.425,27.051 99.822,25.654 C170.2 C171.2 U10.4 112.395,25.654 ; R116.1 104.775,17.752 109.319,17.752 112.395,20.828 112.395,25.654 ; L20.1 107.529,17.653 ; U10.0 112.395,25.654
NetC161_2: C161.2 C162.2 L19.2 R108.2 R115.1 U10.1 | length 22.7
  Top Layer w0.381: R115.1 R108.2 108.783,29.718 U10.1 109.576,29.464 109.835,29.724 109.835,30.262 111.928,32.355 111.928,32.894 113.237,34.203 L19.2 120.043,34.203 C161.2 C162.2
NetC163_1: C163.1 C164.1 R116.2 R120.2 U10.6 | length 9.6
  Top Layer w0.381: R116.2 106.398,19.332 C163.1 ; 105.664,19.431 105.664,21.844 106.934,23.114 U10.6
NetC165_2: C165.2 R112.2 U11.7 | length 43.4
  Top Layer w0.381: v1(49.718,18.857) R112.2 C165.2@54.356,21.114
  Mid-Layer 1 w0.381: U11.7 20.637,18.857 v1(49.718,18.857)
NetC166_2: C166.2 C167.2 C168.2 L20.2 R109.2 | length 26.4
  Top Layer w0.381: C168.2 C166.2 82.804,13.716 ; R109.2 82.804,13.716 ; L20.2 98.044,11.684 95.932,13.796 C167.2 82.884,13.796 82.804,13.716
NetC169_1: C169.1 L21.1 R119.1 T3.3 | length 13.5
  Top Layer w0.381: L21.1@50.927,31.242 C169.1 54.61,31.682 54.61,35.433 52.317,37.726 T3.3
NetC170_1: C170.1 C171.1 U10.5 | length 5.3
  Top Layer w0.381: C170.1 C171.1 106.878,24.074 107.188,24.384 U10.5
NetC172_2: C172.2 L21.2 R118.1 U11.6 | length 35.7
  Top Layer w0.381: L21.2 47.018,30.492 R118.1 ; L21.2@45.974,31.71 v1(45.974,38.735)
  Mid-Layer 1 w0.381: U11.6 38.227,48.26 45.974,40.513 v1(45.974,38.735)
NetC173_1: C173.1 C174.1 C175.1 C176.1 D11.1 D12.1 L22.1 L22.3 R121.2 R122.2 R123.2 U12.3 | length 6.2
  Top Layer w0.381: U12.3 84.578,57.399 84.588,57.409 84.588,57.659 87.374,60.445 R121.2
NetC178_1: 
NetD8_1: D8.1 R107.2 R114.1 T3.1 | length 16.5
  Top Layer w0.381: D8.1 48.26,46.101 48.905,45.456 T3.1 ; 50.038,45.466 50.038,52.578 50.574,53.114 51.689,53.114 R114.1@51.689,54.864
NetD8_2: D8.2 D9.1 | length 1.3
  Top Layer w0.254: D8.2 D9.1
NetD9_2: D9.2 D10.1 | length 1.6
  Top Layer w0.254: D9.2 D10.1
NetD13_1: D13.1 R125.1 R128.1 T4.1 | length 11.1
  Top Layer w0.381: R128.1@66.157,80.518 R128.1 R128.1@66.207,80.629
  Top Layer w1: T4.1 66.157,80.518 70.193,80.518 ; R125.1@70.193,79.144 70.193,80.518 ; D13.1@70.193,82.169 70.193,80.518
NetD13_2: D13.2 D15.1 | length 1.8
  Top Layer w0.381: D13.2 D15.1
NetD14_1: D14.1 D15.2 | length 1.8
  Top Layer w0.381: D15.2 D14.1
NetR98_1: R98.1 R101.2 U8.5 | length 6.1
  Top Layer w0.381: U8.5 R101.2@93.853,46.355 ; R98.1 R101.2
NetR101_1: R101.1 R105.2 | length 3.4
  Top Layer w0.381: R101.1 95.56,47.78 95.758,47.978 R105.2
NetR102_1: R102.1 R103.2 U8.3 | length 3.9
  Top Layer w0.381: R103.2 R102.1 U8.3
NetR106_2: R106.2 U8.4 | length 3.4
  Top Layer w0.381: R106.2 82.534,44.533 82.76,44.533 84.058,45.831 84.058,46.305 84.108,46.355 U8.4
NetR108_1: R108.1 U10.2 | length 3.5
  Top Layer w0.381: R108.1 108.981,28.138 U10.2
NetR110_1: R110.1 U11.4 | length 24.6
  Top Layer w0.381: v1(46.101,57.658) 47.724,59.281 R110.1
  Mid-Layer 1 w0.381: U11.4 28.067,56.261 29.464,57.658 v1(46.101,57.658)
NetR110_2: R110.2 R111.1 U11.2 | length 36.6
  Top Layer w0.381: v1(46.101,60.071) 47.752,61.722 49.911,61.722 ; R110.2 49.911,61.722 ; R111.1 49.911,61.722
  Mid-Layer 1 w0.381: U11.2 23.271,60.071 v1(46.101,60.071)
NetR111_2: R111.2 U11.1 | length 41
  Top Layer w0.381: v1(46.101,62.512) 47.752,64.163 R111.2
  Mid-Layer 1 w0.381: U11.1 20.602,62.512 v1(46.101,62.512)
NetR113_2: R113.2 R118.2 U11.3 | length 42.8
  Top Layer w0.381: v1(45.085,24.765) 45.129,24.721 R118.2@45.129,22.816 ; R113.2 R118.2
  Mid-Layer 1 w0.381: U11.3 22.987,46.736 44.748,24.975 44.762,24.975 44.972,24.765 v1(45.085,24.765)
NetR115_2: R115.2 R117.2 U10.3 | length 8.7
  Top Layer w0.381: R117.2 103.06,28.138 ; R115.2 103.06,28.138 ; U10.3 103.378,26.924 103.06,27.241 103.06,28.138
NetR124_1: R124.1 T5.3 | length 3.2
  Top Layer w0.381: T5.3@81.01,78.867 T5.3 T5.3@81.085,78.91
  Top Layer w0.508: R124.1 T5.3@81.01,78.867
NetR124_2: R124.2 R125.2 | length 2.5
  Top Layer w0.381: R125.2 74.236,79.121 R124.2
NetR126_2: R126.2 R129.2 T5.2 | length 4
  Top Layer w0.381: R126.2 R126.2@82.042,72.997 ; R129.2@81.976,74.869 R129.2
  Top Layer w0.508: R129.2@81.976,74.869 T5.2 ; R126.2@82.042,72.997 R129.2
NetR127_1: R127.1 T6.3 | length 2.4
  Top Layer w0.381: R127.1@74.25,76.311 R127.1 74.627,75.934 74.627,75.09 75.311,74.406 T6.3@75.374,74.343
NetR127_2: R127.2 R129.1 T5.1 | length 6.2
  Top Layer w0.381: R127.2@76.768,75.629 76.388,76.008 R127.2 80.142,76.073 ; R129.1 80.142,76.073 ; T5.1@80.142,76.637 80.142,76.073
NetR222_1: R222.1 T6.1 | length 2.5
  Top Layer w0.381: R222.1 71.959,72.406 T6.1@74.361,72.406
pads on no net: D7.2

## Polygon pours and split planes (outlines as drawn)
GND on Mid-Layer 1 "DY" (solid, remove dead copper, pour order 1): 4.699,86.995 157.734,86.995 157.734,5.207 4.699,5.207
GND on Mid-Layer 2 "DY" (solid, remove dead copper, pour order 2): 4.699,86.995 157.734,86.995 157.734,5.207 4.699,5.207
GND on Bottom Layer "DY" (solid, remove dead copper, pour order 3): 4.699,86.995 157.734,86.995 157.734,5.207 4.699,5.207
GND on Top Layer "DY" (solid, remove dead copper, pour order 0): 4.699,86.995 157.734,86.995 157.734,5.207 4.699,5.207

## Keep-outs
Keep-Out Layer:
  lines w0.1: 4.699,6.731 ccw(c6.223,6.731) 6.223,5.207 156.21,5.207 ccw(c156.21,6.731) 157.734,6.731 157.734,85.471 ccw(c156.21,85.471) 156.21,86.995 6.223,86.995 ccw(c6.223,85.471) 4.699,85.471 4.699,6.731
  lines w0.254: 22.116,70.231 39.116,70.231 39.116,80.231 22.116,80.231 22.116,70.231

## Other copper
Top Layer:
  rectangle net NetC173_1: 89.662,56.515 138.176,71.515
  rectangle net NetC173_1: 86.487,60.96 90.932,71.515
  rectangle net -5V: 34.243,6.858 39.243,11.858
  rectangle net +5V: 16.971,6.858 21.971,11.858
  rectangle net +200V: 51.515,6.858 56.515,11.858
  rectangle net GND: 112.522,8.128 115.697,11.303
  rectangle net GND: 115.443,5.979 116.967,9.398
  rectangle net GND: 121.158,11.684 128.016,12.876
  rectangle net GND: 123.825,17.145 134.688,18.161
  rectangle net GND: 108.458,19.304 109.474,22.033
  rectangle net GND: 100.965,20.701 104.112,22.098
  rectangle net GND: 155.702,6.731 157.48,53.184
  rectangle net GND: 150.442,5.461 156.21,11.811
  rectangle net GND: 5.715,5.588 15.44,8.255
  rectangle net GND: 23.502,5.588 32.712,10.287
  rectangle net GND: 40.774,5.588 49.984,10.414
  rectangle net GND: 58.046,5.588 116.967,6.985
  rectangle net GND: 101.092,29.21 102.743,31.877
  rectangle net GND: 5.715,84.836 156.337,86.614
  rectangle net +30VIN: 142.24,54.737 156.083,74.168
  rectangle net GND: 153.543,75.692 157.48,85.471
  rectangle net GND: 62.738,80.137 64.516,83.693
  rectangle net GND: 5.08,6.223 7.366,85.979
  rectangle net GND: 50.927,24.638 54.737,25.908
  rectangle net GND: 77.851,56.769 80.01,58.801
  region net +21V: 41.656,81.534 41.656,74.549 54.483,74.549 54.483,81.534
  rectangle net GND: 112.649,16.256 114.427,18.288
  rectangle net GND: 49.53,56.007 51.943,57.15
  region net +30V: 58.293,70.866 82.804,70.866 82.804,60.833 68.834,60.833 68.834,37.846 74.676,32.004 74.676,17.907 64.516,17.907 64.516,31.496 58.293,37.719 58.293,60.833
  pour cut-out: 89.662,55.753 92.837,55.753 92.837,51.435 89.662,51.435
  pour cut-out: 84.074,46.065 92.329,46.065 92.329,41.402 84.074,41.402
  pour cut-out: 82.296,58.166 85.471,58.166 85.471,51.816 82.296,51.816
  pour cut-out: 73.279,79.994 76.454,79.994 76.454,71.898 73.279,71.898
  pour cut-out: 46.609,22.499 47.691,22.499 47.691,21.463 46.609,21.463
  pour cut-out: 46.386,50.546 58.578,50.546 58.578,35.306 46.386,35.306
  pour cut-out: 69.533,86.106 75.311,86.106 75.311,84.963 69.533,84.963
  pour cut-out: 133.223,37.211 133.223,38.284 146.372,38.284 146.372,37.211
  pour cut-out: 147.32,21.209 147.32,24.638 149.931,24.638 149.931,21.209
  pour cut-out: 148.336,5.884 148.336,9.059 150.442,9.059 150.442,5.884
  pour cut-out: 120.847,6.477 120.847,15.82 133.858,15.82 133.858,6.477
  pour cut-out: 120.847,15.367 120.847,18.542 125.165,18.542 125.165,15.367
  pour cut-out: 107.95,19.05 107.95,21.209 114.046,21.209 114.046,19.05
  pour cut-out: 138.303,8.255 138.303,9.779 142.621,9.779 142.621,8.255
  pour cut-out: 141.986,8.255 141.986,11.43 144.78,11.43 144.78,8.255
  pour cut-out: 83.82,71.755 83.82,74.93 141.605,74.93 141.605,71.755
  pour cut-out: 94.745,53.184 94.745,56.359 156.718,56.359 156.718,53.184
  pour cut-out: 15.44,5.588 15.44,6.858 16.637,6.858 16.637,5.588
  pour cut-out: 22.479,5.588 22.479,6.858 23.502,6.858 23.502,5.588
  pour cut-out: 32.712,5.588 32.712,6.858 33.782,6.858 33.782,5.588
  pour cut-out: 39.751,5.588 39.751,6.858 40.774,6.858 40.774,5.588
  pour cut-out: 49.984,5.588 49.984,6.858 51.181,6.858 51.181,5.588
  pour cut-out: 56.896,5.588 56.896,6.858 58.046,6.858 58.046,5.588
  pour cut-out: 122.428,21.59 122.428,22.663 130.175,22.663 130.175,21.59
  pour cut-out: 118.049,29.718 118.049,32.258 122.367,32.258 122.367,29.718
  pour cut-out: 107.061,31.115 107.061,31.722 108.204,31.722 108.204,31.115
  pour cut-out: 155.829,75.692 155.829,74.803 154.686,74.803 154.686,75.699
  pour cut-out: 54.483,83.121 69.088,83.121 69.088,72.517 54.483,72.517
  pour cut-out: 42.863,26.924 53.911,26.924 53.911,19.031 42.863,19.031
  pour cut-out: 52.197,15.494 56.515,15.494 56.515,13.208 52.197,13.208
  pour cut-out: 62.474,17.907 76.814,17.907 76.814,14.859 62.474,14.859
  region net GND: 5.08,85.979 5.715,86.614 6.096,86.614 6.096,85.471 5.08,85.471
  region net GND: 5.08,6.223 5.715,5.588 5.969,5.588 5.969,6.477 5.08,6.477
  region net GND: 156.21,5.461 157.48,6.731 157.48,7.112 155.829,7.112 155.829,5.461
  region net GND: 156.337,86.614 157.48,85.471 157.48,85.217 156.083,85.217 155.956,85.344 155.956,86.614
Mid-Layer 1:
  rectangle net GND: 5.715,84.455 156.337,86.614
  rectangle net GND: 5.715,5.588 142.021,7.747
  rectangle net GND: 149.25,5.461 156.21,7.747
  rectangle net GND: 155.448,6.731 157.48,85.471
  rectangle net GND: 5.08,6.223 7.874,85.979
  pour cut-out: 148.745,9.652 149.253,9.652 149.253,5.461 148.745,5.461
  pour cut-out: 142.021,9.652 142.529,9.652 142.529,5.461 142.021,5.461
Mid-Layer 2:
  rectangle net GND: 155.448,6.731 157.48,85.471
  rectangle net GND: 149.352,5.461 156.21,7.112
  rectangle net GND: 5.08,6.223 6.858,85.979
  rectangle net GND: 5.715,84.836 156.337,86.614
  rectangle net GND: 5.715,5.588 142.021,6.985
  pour cut-out: 148.471,11.216 149.36,11.216 149.36,5.334 148.471,5.334
  pour cut-out: 140.557,10.327 140.557,11.216 149.36,11.216 149.36,10.327
  pour cut-out: 110.871,11.62 120.852,11.62 120.852,9.716 110.871,9.716
Bottom Layer:
  rectangle net GND: 5.715,5.588 142.021,7.112
  rectangle net GND: 5.715,84.455 156.337,86.614
  rectangle net GND: 5.08,6.223 7.239,85.979
  rectangle net GND: 149.352,5.461 156.21,7.4
  rectangle net GND: 154.559,6.731 157.48,85.471
  pour cut-out: 149.36,9.493 149.36,6.096 148.344,6.096 148.344,9.493

## Silkscreen, mask and mechanical layers (free items; w line width, h text height)
Top Overlay:
  text "+21V" at 36.323,84.074 h1.52
  text "Y904A23-GF-DYPCB-V1.0" at 118.242,82.474 h1.52
  text "2023.10.16" at 117.861,80.061 h1.52
  text "+30V" at 66.549,28.956 h1.52
  text "+5V" at 12.066,8.89 h1.52
  text "+200V" at 42.038,8.636 h1.52
  text "-5V" at 27.941,8.509 h1.52
Top Solder:
  circle w2.032: c68.199,10.541 r2.54
  circle w2.032: c87.249,82.169 r2.54
  circle w2.032: c12.065,72.39 r2.54
  rectangle: 17.018,6.858 21.971,11.811
  rectangle: 34.29,6.858 39.243,11.811
  rectangle: 51.562,6.858 56.515,11.811
  rectangle: 64.516,17.907 74.676,27.686
  rectangle: 147.828,54.737 156.083,74.168
  region: 156.591,38.481 151.511,38.481 151.511,13.97 156.591,13.97
  rectangle: 134.366,38.989 147.447,49.276
  region: 51.943,74.549 51.943,81.534 42.545,81.534 42.545,74.549
  rectangle: 42.037,66.802 49.657,72.263
  rectangle: 111.633,7.112 115.189,9.652
Bottom Solder:
  rectangle: 154.559,6.731 157.734,85.471
  rectangle: 6.223,84.455 156.21,86.995
  rectangle: 4.699,6.731 6.858,85.471
  rectangle: 6.223,5.207 141.986,7.112
  rectangle: 149.352,5.207 156.21,7.4
  region: 156.21,85.471 157.734,85.471 ccw(c156.21,85.471) 156.21,86.995
  region: 6.223,85.471 6.223,86.995 ccw(c6.223,85.471) 4.699,85.471
  region: 6.223,6.731 4.699,6.731 ccw(c6.223,6.731) 6.223,5.207
  region: 156.21,6.731 156.21,5.207 ccw(c156.21,6.731) 157.734,6.731
  region: 42 vertices and 25 holes, not listed, extent 6.358,6.866 156.04,85.336
  lines w0.013: 4.699,6.731 ccw(c6.223,6.731) 6.223,5.207 6.223,6.731 4.699,6.731 ; 4.699,85.471 cw(c6.223,85.471) 6.223,86.995 6.223,85.471 4.699,85.471 ; 156.21,5.207 ccw(c156.21,6.731) 157.734,6.731 156.21,6.731 156.21,5.207 ; 156.21,85.471 157.734,85.471 ccw(c156.21,85.471) 156.21,86.995 156.21,85.471

## Text inside footprints (layer, text, board x,y; h text height)
U11: Mechanical 4 "H=20mm" at 26.327,31.737 h2 r90